# Altium PCB BlinkLight_NewBat.PcbDoc
Units mil, origin at the board's own origin, x right, y up, seen from the top; angles counter-clockwise.
Board outline 1519.99 x 1159.93 mil, 2 copper layers (Top Layer, Bottom Layer); 10 components, 10 nets, 32 pads, 0 vias.
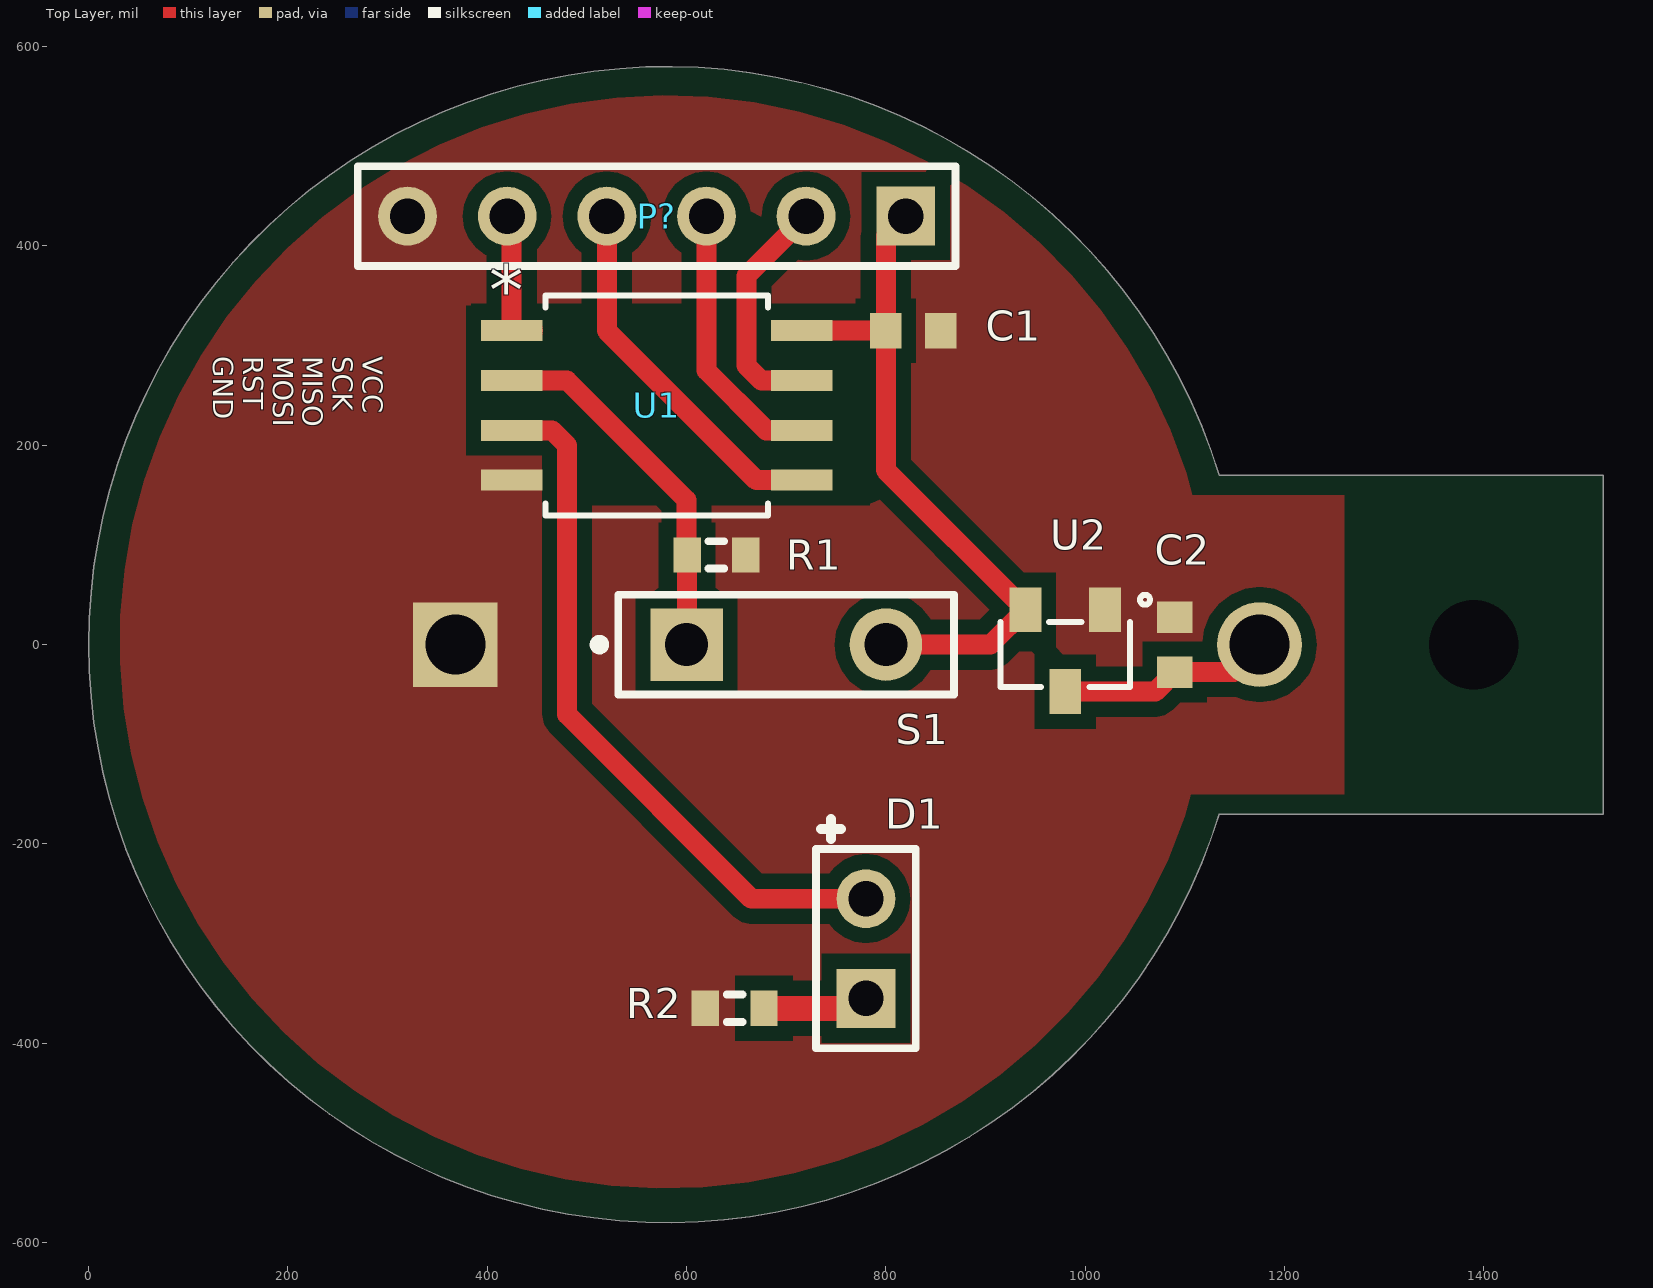
[diagram p0: Top Layer view]
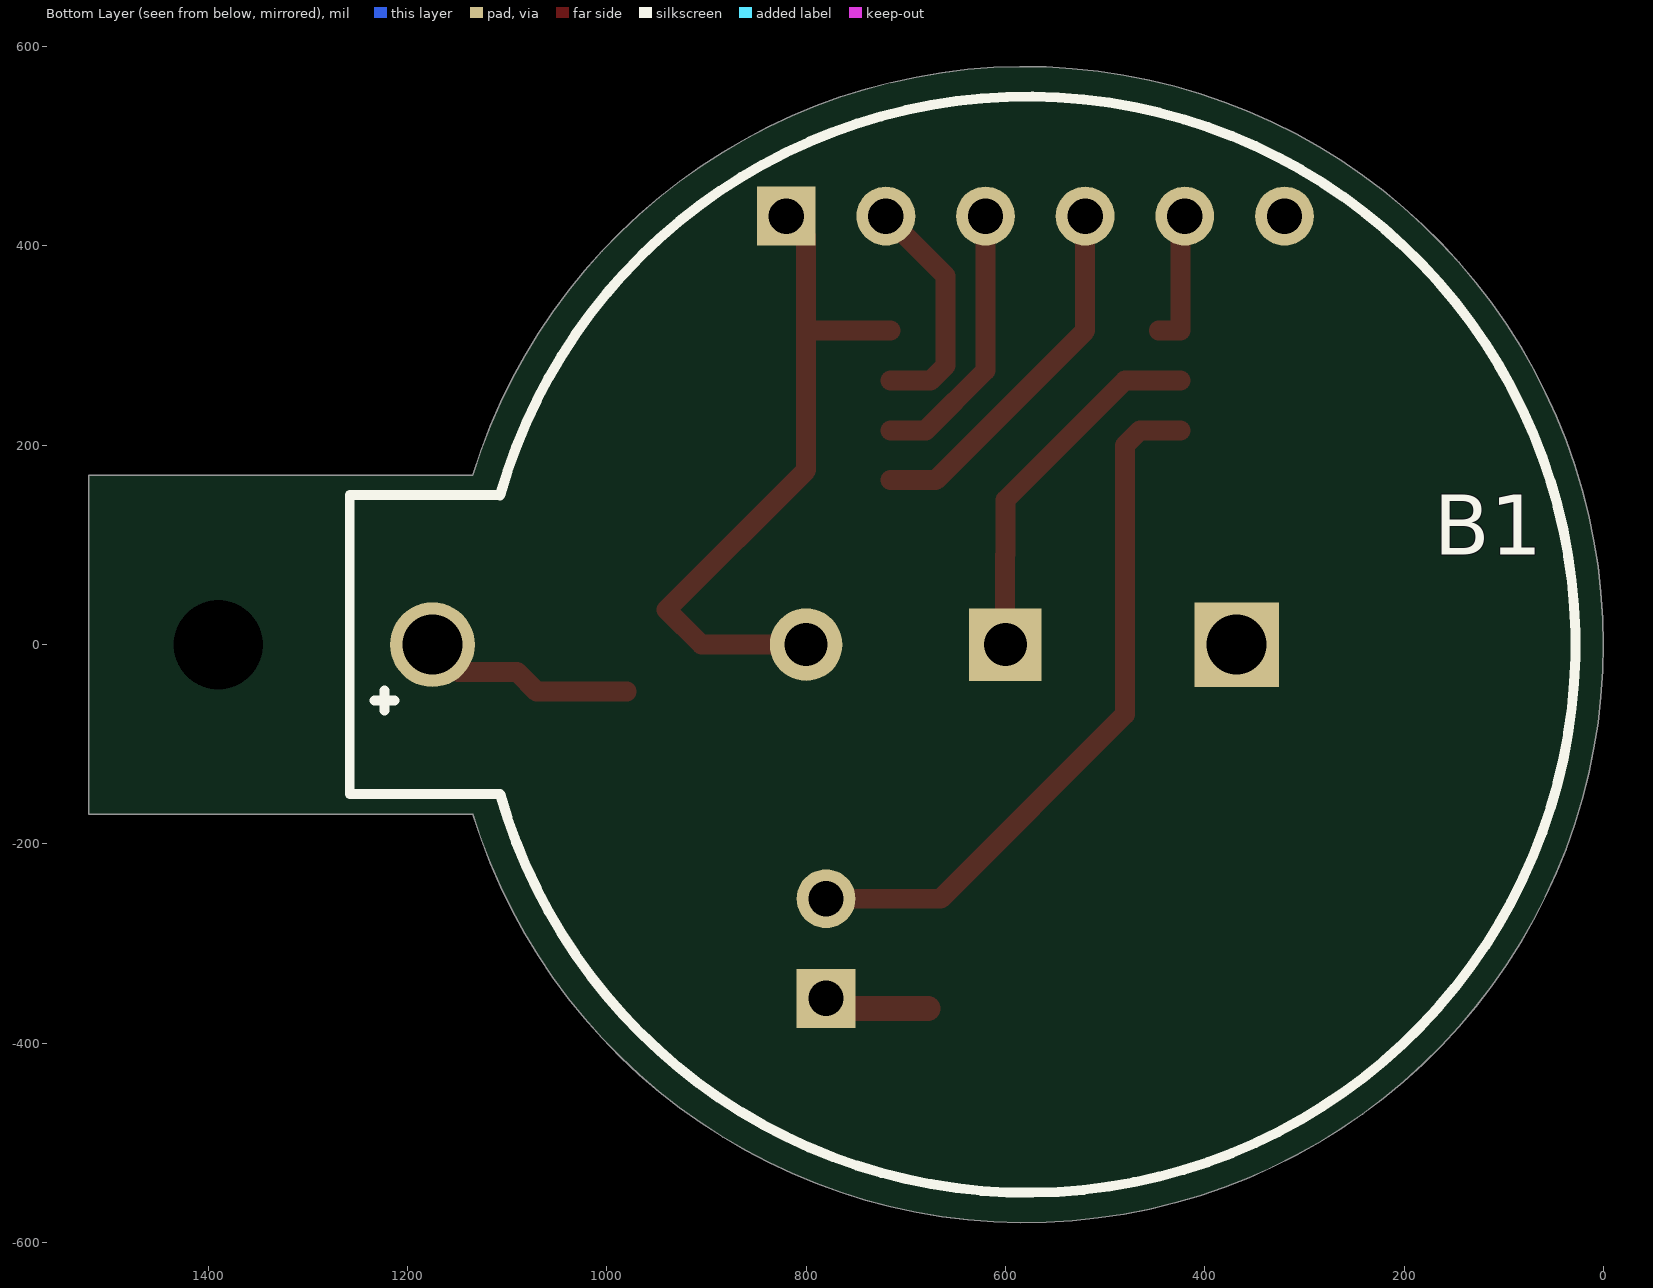
[diagram p1: Bottom Layer view, seen from below]

## Layer stack, top to bottom
Top Solder: solder mask 0.4, Solder Resist, Dk 3.5
Top Layer: signal copper 1.4
Dielectric 1: dielectric 12.6, FR-4, Dk 4.8
Bottom Layer: signal copper 1.4
Bottom Solder: solder mask 0.4, Solder Resist, Dk 3.5

## Board outline
1134.52,169.99 1520,170 1520,-170 1134.51,-170 cw(c580,0.01)

## Design rules (kind name [scope] priority, off if disabled: settings)
Clearance [All] p1: gap=15 ignorepadtopadclearanceinfootprint=FALSE except(0: Arc-Hole Track-Hole SMDPad-Hole THPad-Hole Via-Hole Fill-Hole Poly-Hole Region-Hole Text-Hole; 9: Arc-SMDPad Track-SMDPad; 10: Arc-Arc Arc-Track Arc-THPad Arc-Via Arc-Text Track-Track Track-THPad Track-Via Track-Text SMDPad-SMDPad SMDPad-THPad SMDPad-Via SMDPad-Text THPad-THPad THPad-Via THPad-Text Via-Via Via-Text Fill-Text Poly-Text Region-Text Text-Text)
PolygonConnect [All] p1: connectstyle=Direct reliefconductorwidth=10 reliefentries=4 polygonreliefangle="90 Angle" airgapwidth=10
RoutingVias [All] p1: holewidth=28 width=50 viastyle="Through Hole" minholewidth=28 minwidth=50 maxholewidth=28 maxwidth=50
SolderMaskExpansion [All] p1: expansion=4
Width [All] p1: maxlimit=60 minlimit=10 preferedwidth=10 minimp=50.000000 maximp=50.000000 favimp=50.000000
30 further rules are at their usual default settings.

## Classes and differential pairs
component class ATTinySchematic: C1 C2 C? D1 R1 R2 S1 U1 U2

## Components (designator, comment, footprint, x,y, rotation, side; value= is the part's Value field where it differs from the comment)
B1 "Keystone 1025" 1025 368,0 r0 bottom
C1 "Cap Semi" 1608[0603] 827.56,315 r180 top value=1uF
C2 "Cap Semi" 1608[0603] 1090,0 r270 top value=1uF
D1 "white, 3.2 V, 20 mA" HDR1X2 780,-355 r90 top
P? "Header 6" HDR1X6 820,430 r180 top
R1 "Res3" J1-0603 630,90 r180 top value=100K
R2 "Res3" J1-0603 648.19,-365 r0 top value=5
S1 "SW-PB" SPST-2 700,0 r0 top
U1 "ATTiny85" 8S2 570,240 r0 top
U2 "AP2120N-3.3TRG1" SOT-23 980,-10 r180 top value=Value

## Footprints (in the part's own frame and the unit in brackets; to place one, negate y for a bottom-side part, rotate by r counter-clockwise, add the part's x,y. Pads: shape width x height; smd on the part's side, far side on the other; paste and mask are expansions set on the pad)
8S2 [mil]
  rect 62x21 smd paste+0 mask+0: 1(-145.5,75) 2(-145.5,25) 3(-145.5,-25) 4(-145.5,-75) 5(145.5,-75) 6(145.5,-25) 7(145.5,25) 8(145.5,75)
  silkscreen extent -112,-110 112,110, body extent -157,-105 167,106, height 85
1025 [mil] "BATT HOLDER COIN 1/2 CELL PC PIN"
  round 85 hole 60: 1(807,0)
  rect 85x85 hole 60: 2(0,0)
  silkscreen extent -340,-550 890,550, body extent -334,-560 885,547, height 503
1608[0603] [mm] "Chip Capacitor, Body 1.6x0.8mm, IPC High Density"
  rect 0.8x0.9 smd: 1(-0.7,0) 2(0.7,0)
  body extent -0.87,-0.48 0.87,0.48, height 1.3
HDR1X2 [mm] "Connector; Header; 2 Position"
  rect 1.5x1.5 hole 0.9: 1(0,0)
  round 1.5 hole 0.9: 2(2.54,0)
  silkscreen extent -1.27,-1.27 4.57,1.27
HDR1X6 [mm] "Connector; Header; 6 Position"
  rect 1.5x1.5 hole 0.9: 1(0,0)
  round 1.5 hole 0.9: 2(2.54,0) 3(5.08,0) 4(7.62,0) 5(10.16,0) 6(12.7,0)
  silkscreen extent -1.27,-1.27 13.97,1.27
J1-0603 [mm] "Chip Resistor, Body 1.6x0.8mm, IPC High Density"
  rect 0.7x0.9 smd: 1(-0.75,0) 2(0.75,0)
  silkscreen extent -0.2,-0.35 0.2,0.35, body extent -0.85,-0.48 0.85,0.48, height 0.9
SOT-23 [mil]
  rect 32x45 smd paste+0 mask+0: 1(-40,-45) 2(40,-45) 3(0,37.2)
  silkscreen extent -85,-60 65,33, body extent -58,-62 60,50, height 47
SPST-2 [mm] "Switch; 2 Leads"
  rect 1.85x1.85 hole 1.1: 1(-2.54,0)
  round 1.85 hole 1.1: 2(2.54,0)
  silkscreen extent -4.89,-1.27 4.28,1.27

## Part data
B1: "BATT HOLDER COIN 1/2 CELL PC PIN"
C1 C2: "Capacitor (Semiconductor SIM Model)", LatestRevisionDate=29-May-2009, LatestRevisionNote="IPC-7351 Footprint Added.", PackageDescription="Chip Capacitor", PackageReference=C1206, Published=8-Jun-2000, Publisher="Altium Limited"
D1: library part LED2, "Typical RED, GREEN, YELLOW, AMBER GaAs LED", LatestRevisionDate=17-Jul-2002, LatestRevisionNote="Re-released for DXP Platform.", PackageDescription="SM LED; 2 Flat Leads", PackageReference=3.2X1.6X1.1, PackageVersion=Feb-2002, Published=8-Jun-2000, Publisher="Altium Limited"
P?: "Header, 6-Pin", LatestRevisionDate=17-Jul-2002, LatestRevisionNote="Re-released for DXP Platform.", Publisher="Altium Limited"
R1 R2: "Resistor", LatestRevisionDate=29-May-2009, LatestRevisionNote="IPC-7351 Footprint Added.", PackageDescription="Chip Resistor", PackageReference=J1-0603, Published=8-Jun-2000, Publisher="Altium Limited"
S1: "Switch", LatestRevisionDate=17-Jul-2002, LatestRevisionNote="Re-released for DXP Platform.", PackageDescription="Switch; 2 Leads", PackageReference=SPST-2, Published=24-Mar-1999, Publisher="Altium Limited"
U2: "IC REG LINEAR 3.3V 150MA SOT23", Built_By=EMA_UL_Team, Manufacturer_Part_Number=AP2120N-3.3TRG1, RefDes=RefDes, Type=DEV, Vendor="Diodes Inc"

## Free pads (board coordinates)
  round 60 hole 90 unplated: 2(1390,0)

## Nets (pads, with @x,y where several pads share a name; then routed paths per layer and width w, separated by ;. In a path a pad name is that pad's centre, name@x,y a point inside that pad or via, vN(x,y) a via of type N, cw(c..) or ccw(c..) an arc to the next point about the centre after c; other vN are vias at no path point)
GND: B1.2 C1.1 C2.1 P?.6 R1.1 R2.1 U1.4 U2.1
MISO: P?.3 U1.6 | length 275.4
  Top Layer w20: P?.3 620,275 680,215 U1.6
MOSI: P?.4 U1.5 | length 372.6
  Top Layer w20: P?.4 520,315 670,165 U1.5
NetD1_1: D1.1 R2.2 | length 106.4
  Top Layer w25: R2.2 770,-365 D1.1
NetD1_2: D1.2 U1.3 | length 708.3
  Top Layer w20: U1.3 465,215 480,200 480,-70 665,-255 D1.2
NetR1_2: R1.2 S1.1 U1.2 | length 374.8
  Top Layer w20: U1.2 480,265 600,145 600,90.47 R1.2 600.47,0.47 S1.1 S1.1@597,-3
RST: P?.5 U1.1 | length 138.5
  Top Layer w20: P?.5 424.5,425.5 U1.1 U1.1@446.14,315
SCK: P?.2 U1.7 | length 236.6
  Top Layer w20: U1.7 675,265 660,280 660,370 P?.2
VBAT: B1.1 C2.2 U2.3 | length 216.6
  Top Layer w20: U2.3 1070.35,-47.2 C2.2 1149.44,-27.56 B1.1@1177,0
VCC: C1.2 P?.1 S1.2 U1.8 U2.2 | length 700.3
  Top Layer w20: U1.8 C1.2 ; S1.2 905,0 U2.2 800,175 C1.2 ; P?.1 800,410 C1.2

## Polygon pours and split planes (outlines as drawn)
GND on Top Layer "gnd plane" (solid, pour order 7): 1107.65,150 ccw(c579.81,2.66) 1106.14,-150 1260,-150 1260,150

## Other copper
Top Layer:
  pour cut-out: 445,345 447.28,342.72 784.51,342.72 784.51,139.51 475,139.51 475,208.22 383.5,208.22 383.5,342.72 446.2,342.72
  pour cut-out: 449.99,335.5

## Silkscreen, mask and mechanical layers (free items; w line width, h text height)
Top Overlay:
  text "VCC / SCK / MISO / MOSI / RST / GND" at 125,289.5 h20 r270
Outline:
  circle w10: c1390,0 r42.43
  lines w10: 1134.51,-170 cw(c580,0.01) 1134.52,169.99 1520,170 1520,-170 ; 1135,-170 1520.48,-169.99 ; 1270,-170 1270,170

## Text inside footprints (layer, text, board x,y; h text height)
U1: Top Overlay "*" at 402,331 h50; Mechanical 13 "*" at 466,292.5 h50